# Altium PCB quadrupe.PcbDoc
Units mil, origin at the board's own origin, x right, y up, seen from the top; angles counter-clockwise.
Board outline 1710 x 2670 mil, 2 copper layers (Top Layer, Bottom Layer); 61 components, 55 nets, 278 pads, 26 vias.
Unrouted connection lines stored in the file: 2.
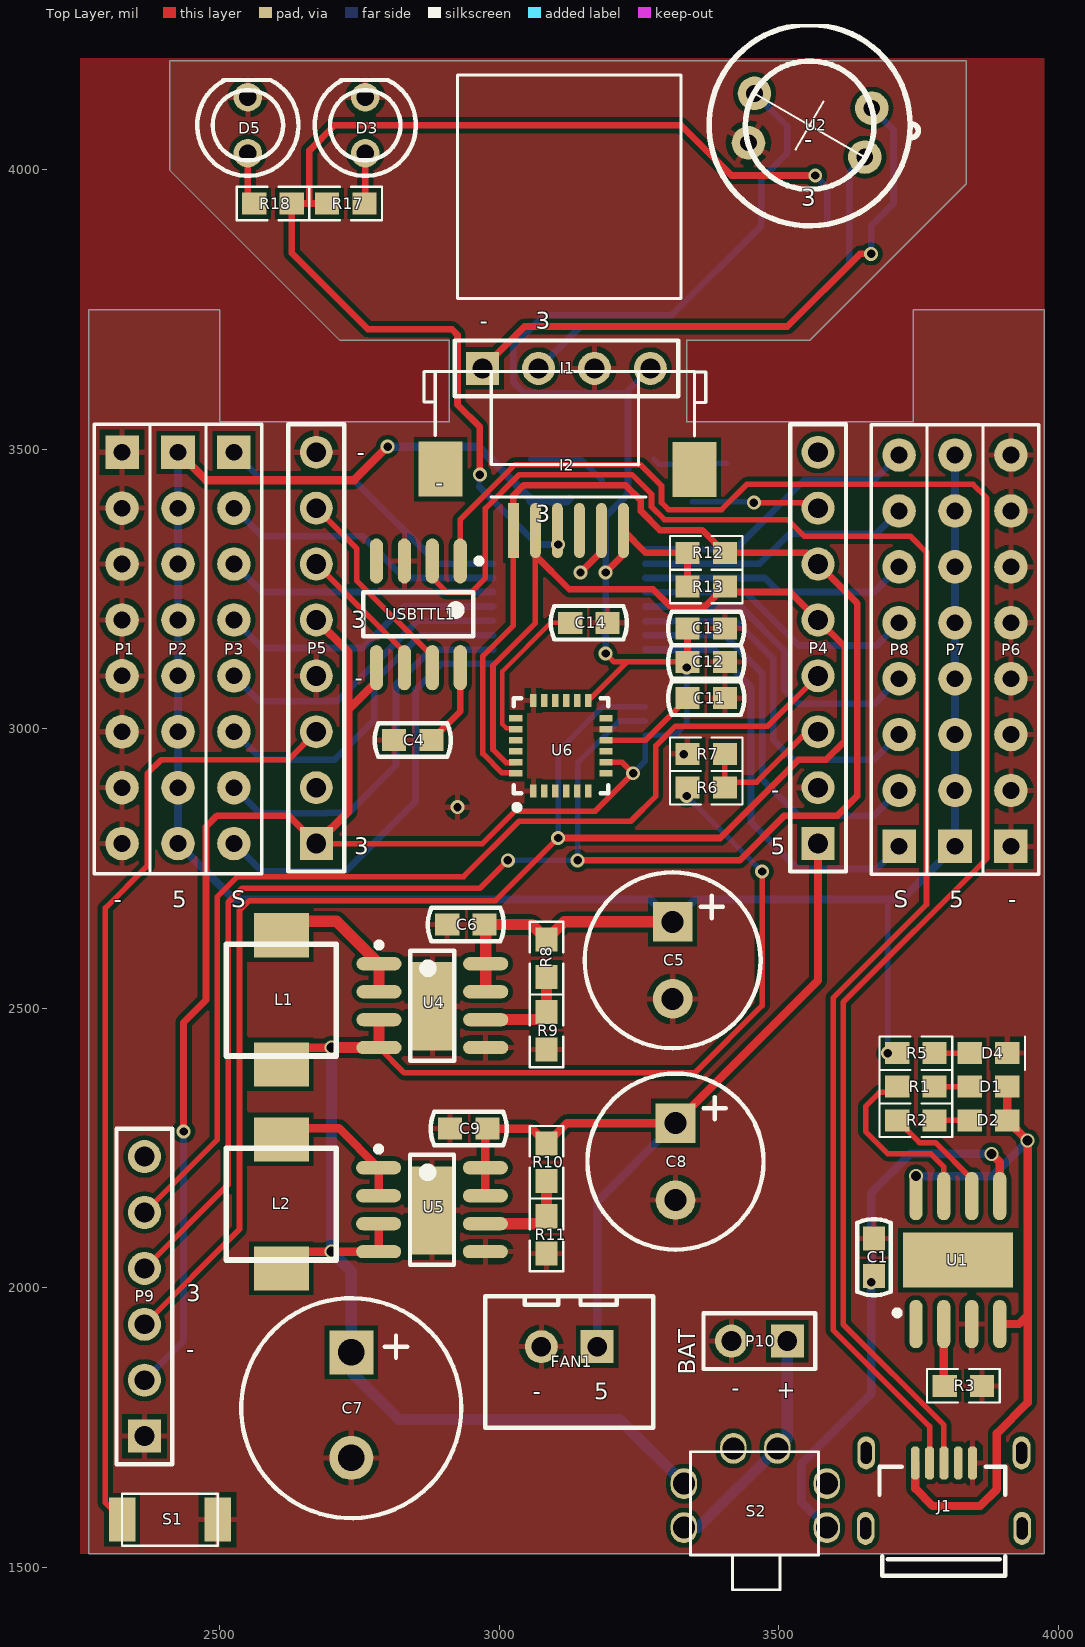
[diagram p0: Top Layer view]
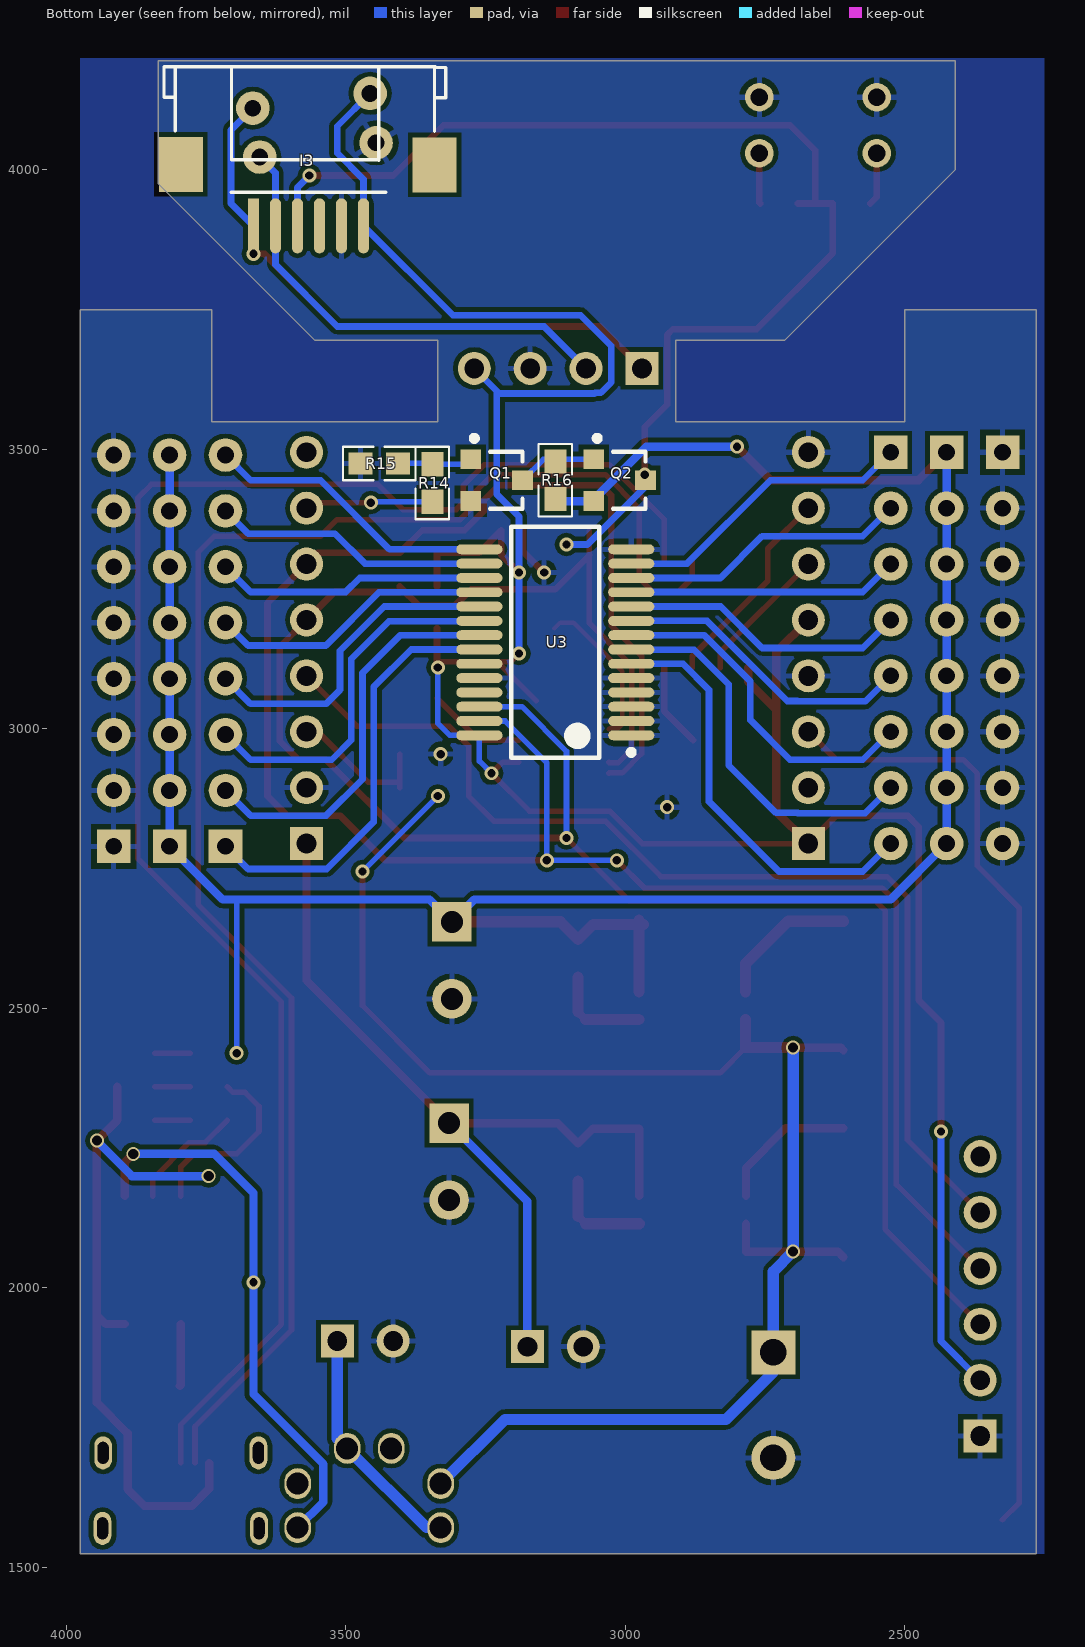
[diagram p1: Bottom Layer view, seen from below]

## Layer stack, top to bottom
Top Layer: signal copper 1.4
Dielectric: dielectric 12.6, FR-4, Dk 4.8
Bottom Layer: signal copper 1.4

## Board outline
2265,1525 2265,3750 2500,3750 2500,3550 2910,3550 2910,3695 2715,3695 2410,4000 2410,4195 3835,4195 3835,3975 3555,3695 3335,3695 3335,3550 3740,3550 3740,3750 3975,3750 3975,1525

## Design rules (kind name [scope] priority, off if disabled: settings)
Clearance Clearance_1 [ispad vs ispad] p1: gap=2
Clearance [All] p2: gap=8
PolygonConnect [All] p1: connectstyle=Relief reliefconductorwidth=10 reliefentries=4 polygonreliefangle="90 Angle" airgapwidth=10
RoutingVias [All] p1: holewidth=15 width=25 viastyle="Through Hole" minholewidth=13 minwidth=15 maxholewidth=28 maxwidth=50
SolderMaskExpansion [All] p1: expansion=4
Width [All] p1: maxlimit=25 minlimit=7 preferedwidth=10
28 further rules are at their usual default settings.

## Components (designator, comment, footprint, x,y, rotation, side; value= is the part's Value field where it differs from the comment)
C1 "Cap" C-RAD-0603 3670,2055 r270 top
C4 "Cap" C-RAD-0603 2845,2980 r0 top
C5 "Cap Pol" C-RB-8 3310,2655 r270 top
C6 "Cap" C-RAD-0603 2940,2650 r0 top
C7 "Cap Pol" C-RB-10 2735,1885 r270 top
C8 "Cap Pol" C-RB-8 3315,2295 r270 top
C9 "Cap" C-RAD-0603 2945,2285 r0 top
C11 "Cap" C-RAD-0603 3370,3055 r180 top
C12 "Cap" C-RAD-0603 3370,3120 r180 top
C13 "Cap" C-RAD-0603 3370,3180 r0 top
C14 "Cap" C-RAD-0603 3160,3190 r180 top
D1 "LED0" 0603-LED 3875,2360 r180 top
D2 "LED0" 0603-LED 3875,2300 r180 top
D3 "LED0" LED_A2 2760,4080 r270 top
D4 "LED0" 0603-LED 3875,2420 r0 top
D5 "LED0" LED_A2 2550,4080 r270 top
FAN1 "Header 2" HDR2X1_B1 3175,1895 r180 top
I1 "Header 4" HDR4X1_A 2970,3645 r0 top
I2 "FPC" FPC1.0-6P-A 3320,3355 r90 top
I3 "FPC" FPC1.0-6P-A 3370,3900 r90 bottom
J1 "USB_M" "USB_MICRO - 4leg" 3795,1575 r0 top
L1 "Inductor" L-SMD-5 2610,2515 r90 top
L2 "Inductor" L-SMD-5 2610,2150 r90 top
P1 "Header 8" HDR8_A1 2325,3495 r270 top
P2 "Header 8" HDR8_A1 2425,3495 r270 top
P3 "Header 8" HDR8_A1 2525,3495 r270 top
P4 "Header 8" HDR1X8 3570,2795 r90 top
P5 "Header 8" HDR1X8 2672.36,2795 r90 top
P6 "Header 8" HDR8_A1 3915,2790 r90 top
P7 "Header 8" HDR8_A1 3815,2790 r90 top
P8 "Header 8" HDR8_A1 3715,2790 r90 top
P9 "Header 6" HDR1X6 2365,1735 r90 top
P10 "Header 2" HDR2X1_A 3515,1905 r180 top
Q1 "SS8050" SOT-23 3230,3445 r270 bottom
Q2 "MOSFET-P" "SOT-23 - MOS" 3010,3445 r270 bottom
R1 "Res1" 0603-1 3745,2360 r180 top
R2 "Res1" 0603-1 3745,2300 r180 top
R3 "Res1" 0603-1 3830,1825 r180 top
R5 "Res1" 0603-1 3745,2420 r180 top
R6 "Res1" 0603-1 3370,2895 r180 top
R7 "Res1" 0603-1 3370,2955 r0 top
R8 "Res1" 0603-1 3084.37,2590 r90 top
R9 "Res1" 0603-1 3084.37,2460 r90 top
R10 "Res1" 0603-1 3084.37,2225 r90 top
R11 "Res1" 0603-1 3084.37,2095 r90 top
R12 "Res1" 0603-1 3370,3315 r0 top
R13 "Res1" 0603-1 3370,3255 r0 top
R14 "Res1" 0603-1 3345,3440 r90 bottom
R15 "Res1" 0603-1 3440,3475 r0 bottom
R16 "Res1" 0603-1 3125,3445 r90 bottom
R17 "Res1" 0603-1 2725,3940 r180 top
R18 "Res1" 0603-1 2595,3940 r0 top
S1 "SW-PB" SW_PB2_3*5 2325,1625 r0 top
S2 "SW_KFC" SW-KFC 3330,1650 r0 top
U1 "TP4056" NSO8_TP4056 3820,2050 r90 top
U2 "MLX90640" MLX90640 3555,4080 r150 top
U3 "pca9685" SSOP-28 3125,3155 r0 bottom
U4 "FP6276" "SOP-8N - 9pad - max" 2880,2505 r0 top
U5 "FP6276" "SOP-8N - 9pad - max" 2879.37,2140 r0 top
U6 "mpu6050" QFN50P400X400X80_HS-25N 3110,2970 r90 top
USBTTL1 "ch340N" SOP-8N 2855,3205 r270 top

## Footprints (in the part's own frame and the unit in brackets; to place one, negate y for a bottom-side part, rotate by r counter-clockwise, add the part's x,y. Pads: shape width x height; smd on the part's side, far side on the other; paste and mask are expansions set on the pad)
0603-1 [mm] "贴片带丝印"
  rect 1.1x1 smd: 1(-0.85,0) 2(0.85,0)
  silkscreen extent -1.65,-0.76 1.65,0.76, body extent -1.14,-0.38 1.14,0.38, height 1
0603-LED [mm]
  rect 1.1x1 smd: 1(-0.85,0) 2(0.85,0)
  silkscreen extent 1.65,-0.76 1.65,0.76, body extent -1.14,-0.38 1.14,0.38, height 1
C-RAD-0603 [mm] "贴片电容"
  rect 1.1x1 smd: 1(-0.85,0) 2(0.85,0)
  silkscreen extent -1.73,-0.76 1.73,0.76, body extent -1.14,-0.38 1.14,0.38, height 1
C-RB-8 [mm] "35V 220UF电容"
  rect 1.8x1.8 hole 1: 1(0,0)
  round 1.8 hole 1: 2(3.5,0)
  silkscreen extent -2.25,-4 5.75,4
C-RB-10 [mm] "35V470uF电容"
  rect 2x2 hole 1.2: 1(0,0)
  round 2 hole 1.2: 2(4.8,0)
  silkscreen extent -2.46,-5 7.54,5
FPC1.0-6P-A [mm] "FPC"
  rect 2.5x0.5 smd: 1(0,7.493)
  oval 2.5x0.5 smd: 2(0,6.493) 3(0,5.493) 4(0,4.493) 5(0,3.493) 6(0,2.493)
  rect 2.5x2 smd: 17(2.794,10.795) 18(2.769,-0.737)
  silkscreen extent 1.52,-1.24 7.22,11.56
HDR1X6 [mm] "Connector; Header; 6 Position"
  rect 1.5x1.5 hole 0.9: 1(0,0)
  round 1.5 hole 0.9: 2(2.54,0) 3(5.08,0) 4(7.62,0) 5(10.16,0) 6(12.7,0)
  silkscreen extent -1.27,-1.27 13.97,1.27
HDR1X8 [mm] "Connector; Header; 8 Position"
  rect 1.5x1.5 hole 0.9: 1(0,0)
  round 1.5 hole 0.9: 2(2.54,0) 3(5.08,0) 4(7.62,0) 5(10.16,0) 6(12.7,0) 7(15.24,0) 8(17.78,0)
  silkscreen extent -1.27,-1.27 19.05,1.27
HDR2X1_A [mm] "Connector; Header; 2 Position"
  rect 1.5x1.5 hole 0.9: 1(0,0)
  round 1.5 hole 0.9: 2(2.54,0)
  silkscreen extent -1.27,-1.27 3.81,1.27
HDR2X1_B1 [mm] "Connector; Header; 4 Position"
  rect 1.5x1.5 hole 0.9: 1(0,0)
  round 1.5 hole 0.9: 2(2.54,0)
  silkscreen extent -2.54,-2.29 5.08,3.68, body extent -2.41,-2.16 5.08,3.56, height 1.5
HDR4X1_A [mm] "Connector; Header; 4 Position"
  rect 1.5x1.5 hole 0.9: 1(0,0)
  round 1.5 hole 0.9: 2(2.54,0) 3(5.08,0) 4(7.62,0)
  silkscreen extent -1.27,-1.27 8.89,1.27
HDR8_A1 [mil]
  rect 60x60 hole 30: 1(0,0)
  round 60 hole 30: 2(100,0) 3(200,0) 4(300,0) 5(400,0) 6(500,0) 7(600,0) 8(700,0)
  silkscreen extent -50,-50 754,50
L-SMD-5 [mm] "贴片电感5*5"
  rect 2x2.5 smd: 1(-2.921,0) 2(2.946,0)
  silkscreen extent -2.54,-2.5 2.54,2.5, body extent -2.54,-2.5 2.54,2.5, height 4
LED_A2 [mm] "直径3MM二极管"
  round 1.3 hole 0.8: 1(1.27,0) 2(-1.27,0)
  silkscreen extent -2.06,-2.3 2.3,2.3
MLX90640 [mil] "红外体温传感器"
  round 60 hole 30: 1(-81,-82) 2(114,0) 3(79,82) 4(-114,0)
  silkscreen extent -180,-180 180,180
NSO8_TP4056 [mm] "SOIC-max660"
  oval 2.2x0.6 smd: 1(-2.908,1.905) 2(-2.908,0.635) 3(-2.908,-0.635) 4(-2.908,-1.905) 5(2.908,-1.905) 6(2.908,-0.635) 7(2.908,0.635) 8(2.908,1.905)
  rect 2.5x5 smd: 9(0,0)
  silkscreen extent -2.52,2.63 -2.28,2.88
QFN50P400X400X80_HS-25N [mm] "QFN, 24-Leads, Body 4.00x4.00mm, Pitch 0.50mm, Thermal Pad 2.65x2.65mm, IPC Medium Density"
  rect 0.6x0.3 smd: 1(-2.05,1.25) 2(-2.05,0.75) 3(-2.05,0.25) 4(-2.05,-0.25) 5(-2.05,-0.75) 6(-2.05,-1.25) 13(2.05,-1.25) 14(2.05,-0.75) 15(2.05,-0.25) 16(2.05,0.25) 17(2.05,0.75) 18(2.05,1.25)
  rect 0.3x0.6 smd: 7(-1.25,-2.05) 8(-0.75,-2.05) 9(-0.25,-2.05) 10(0.25,-2.05) 11(0.75,-2.05) 12(1.25,-2.05) 19(1.25,2.05) 20(0.75,2.05) 21(0.25,2.05) 22(-0.25,2.05) 23(-0.75,2.05) 24(-1.25,2.05)
  silkscreen extent -2.92,-2.15 2.15,2.15, body extent -2,-2 2,2, height 0.8
SOP-8N [mm] "SOP, 8-Leads, Body 5.00x4.00mm, Pitch 1.27mm, IPC Medium Density"
  oval 2.05x0.6 smd: 1(-2.425,1.905) 2(-2.425,0.635) 3(-2.425,-0.635) 4(-2.425,-1.905) 5(2.425,-1.905) 6(2.425,-0.635) 7(2.425,0.635) 8(2.425,1.905)
  silkscreen extent -2.55,-2.5 1,2.88, body extent -2,-2.5 2,2.5, height 2.65
"SOP-8N - 9pad - max" [mm] "SOP, 8-Leads, Body 5.00x4.00mm, Pitch 1.27mm, IPC Medium Density"
  oval 2.05x0.6 smd: 1(-2.425,1.905) 2(-2.425,0.635) 3(-2.425,-0.635) 4(-2.425,-1.905) 5(2.425,-1.905) 6(2.425,-0.635) 7(2.425,0.635) 8(2.425,1.905)
  rect 2x4 smd: 9(0,-0.025)
  silkscreen extent -2.55,-2.5 1,2.88, body extent -2,-2.5 2,2.5, height 2.65
SOT-23 [mm]
  rect 0.9x0.95 smd: 1(-0.95,-1.175) 2(0.95,-1.175) 3(0,1.175)
  silkscreen extent -2.03,-1.14 1.3,1.18
"SOT-23 - MOS" [mm]
  rect 0.9x0.95 smd: D(0,1.175) G(-0.95,-1.175) S(0.95,-1.175)
  silkscreen extent -2.03,-1.14 1.3,1.18
SSOP-28 [mm] "FT232"
  oval 2.1x0.45 smd: 1(-3.45,4.225) 2(-3.45,3.575) 3(-3.45,2.925) 4(-3.45,2.275) 5(-3.45,1.625) 6(-3.45,0.975) 7(-3.45,0.325) 8(-3.45,-0.325) 9(-3.45,-0.975) 10(-3.45,-1.625) 11(-3.45,-2.275) 12(-3.45,-2.925) 13(-3.45,-3.575) 14(-3.45,-4.225) 15(3.45,-4.225) 16(3.45,-3.575) 17(3.45,-2.925) 18(3.45,-2.275) 19(3.45,-1.625) 20(3.45,-0.975) 21(3.45,-0.325) 22(3.45,0.325) 23(3.45,0.975) 24(3.45,1.625) 25(3.45,2.275) 26(3.45,2.925) 27(3.45,3.575) 28(3.45,4.225)
  silkscreen extent -3.57,-5.25 2,5.25, body extent -2.8,-5.25 2.8,5.25, height 2
SW-KFC [mm]
  oval 1.2x1.4 hole 1: 1(0,-2) 2(0,0) 3(2.25,1.6) 4(6.5,-2) 5(6.5,0) 6(4.25,1.6)
  silkscreen extent 0.3,-4.83 6.12,1.45
SW_PB2_3*5 [mm] "2*4"
  rect 1.2x2 smd: 1(0,-1) 2(4.343,-1)
  silkscreen extent 0,-2.18 4.34,0.18, body extent 0,-2.18 4.34,0.18, height 1.4
"USB_MICRO - 4leg" [mm] "USB方孔"
  oval 0.8x1.5 hole 0.5 slot 1 at 90 deg: 0(-3.556,-0.127) 0(-3.531,3.302) 0(3.531,3.302) 0(3.556,-0.127)
  oct 0.4x1.5 smd: 1(-1.295,2.845) 2(-0.645,2.845) 3(0.005,2.845) 4(0.655,2.845) 5(1.305,2.845)
  silkscreen extent -2.92,-2.29 2.79,2.67, body extent -4.1,-1.33 4.1,4.1, height 2.68

## Part data
C1 C4 C6 C9 C11 C12 C13 C14: "无极性电容"
C5 C7 C8: "极性电解电容"
D1 D2 D3 D4 D5: "发光二极管"
FAN1 I1 P10: "接插件"
I2 I3: library part FPC-6P, "FPC排线连接器"
J1: "MicroUSB接口"
L1 L2: "电感"
P1 P2 P3 P4 P5 P6 P7 P8: "Header, 8-Pin"
P9: "Header, 6-Pin"
Q1: "NPN贴片三极管"
Q2: "P-Channel MOSFET"
R1 R2 R3 R5 R6 R7 R8 R9 R10 R11 R12 R13 R14 R15 R16 R17 R18: "贴片电阻"
S1: "微动开关"
S2: "自锁开关 侧卧"
U1: "锂电池充电管理"
U2: "红外热传感器"
U3: "i2c多路pwm控制"
USBTTL1: "串口转USB芯片"

## Via types
v1: diameter 25, hole 15, Top Layer to Bottom Layer, 21 vias
v2: diameter 25, hole 18, Top Layer to Bottom Layer, 5 vias

## Nets (pads, with @x,y where several pads share a name; then routed paths per layer and width w, separated by ;. In a path a pad name is that pad's centre, name@x,y a point inside that pad or via, vN(x,y) a via of type N, cw(c..) or ccw(c..) an arc to the next point about the centre after c; other vN are vias at no path point)
3.3V: C12.2 C13.1 I1.4 I2.6 I3.6 P5.1 P5.5 P9.2 R12.1 R13.1 U2.2 U3.28 U6.8 U6.13 USBTTL1.5 | length 4959.9
  Top Layer w10: P5.1 2969.54,2795 3027.54,2853 3171.43,2853 v1(3239.21,2920.79) 3219.53,2940.47 U6.8 ; U6.13 3228.5,3120 ; v1(3190,3135) 3205,3120 3228.5,3120 ; C12.2 3228.5,3120
  Top Layer w12: v1(2435,2280) 2435,2475 2475,2515 2475,2825 2495,2845 2622.36,2845 P5.1 ; v1(3190,3280) 3221.85,3311.85 I2.6 3261.85,3315 R12.1 R13.1 ; C12.2 C13.1
  Top Layer w15: P5.1 2730,2852.64 2730,3035 ; P5.5 2730,3137.36 2730,3035 ; USBTTL1.5 2780,3085 2730,3035
  Bottom Layer w10: v1(3239.21,2920.79) 3260.83,2942.4 U3.28 3313.66,2988.66 3335,3010 v1(3335,3110)
  Bottom Layer w12: P9.2 2435,1905 v1(2435,2280) ; v1(3190,3135) v1(3190,3280) 3190,3380 3230,3420 3230,3605 I1.4 ; 3225,3600 3055,3600 3053.53,3601.47 3043.53,3601.47 3025,3620 3025,3685 3080,3740 3308.15,3740 I3.6 3468.15,3983.15 3515,4030 3515,4078.27 U2.2
5V: C5.1 C6.2 P2.1 P2.2 P2.3 P2.4 P2.5 P2.6 P2.7 P2.8 P7.1 P7.2 P7.3 P7.4 P7.5 P7.6 P7.7 P7.8 Q2.S R5.2 R8.2 R16.1 U4.7 U4.8 | length 4478.3
  Top Layer w15: P2.1 2475,3445 2740,3445 v1(2800,3505) ; C6.2@2967.48,2650 C6.2@2975.47,2657.99 ; C5.1@3300,2655 C5.1@3310,2665
  Top Layer w20: C6.2@2967.48,2650 3057.83,2650 R8.2 3115.91,2655 C5.1@3300,2655 ; U4.7 U4.8 C6.2@2975.47,2657.99
  Bottom Layer w10: v1(3695,2420) 3695,2695
  Bottom Layer w15: P2.1 P2.2 P2.3 P2.4 P2.5 P2.6 P2.7 P2.8 2525,2695 3270,2695 C5.1 3350,2695 3695,2695 3720,2695 P7.1 P7.2 P7.3 P7.4 P7.5 P7.6 P7.7 P7.8 ; v1(2800,3505) 2962.08,3505 3056.26,3410.82 Q2.S 3121.06,3407.6 R16.1
5VESP: C8.1 C9.2 FAN1.1 P4.1 R10.2 U5.7 U5.8 | length 1549.9
  Top Layer w15: U5.7 U5.8 2974.84,2285 3057.83,2285 R10.2 3120.91,2295 C8.1 3570,2550 P4.1
  Bottom Layer w15: FAN1.1 3175,2155 C8.1
BAT: P4.3 R6.1 R7.2 | length 273.8
  Top Layer w10: R7.2 R6.1 3403.46,2905 3460,2905 3550,2995 P4.3
DC: P9.6
FPC_D: I2.3 I3.3 Q2.D R17.2 R18.2 | length 2115.5
  Top Layer w12: R17.2 2660,3940 ; v1(2965,3455) 2965,3540 2925,3580 2925,3705 2915,3715 2765,3715 2628.46,3851.54 R18.2 2660,3940 ; v1(3565,3990) 3415,3990 3325,4080 2705,4080 2660,4035 2660,3940
  Bottom Layer w12: Q2.D@2963.74,3433.9 3067.64,3330 v1(3105,3330) ; Q2.D@2963.74,3443.9 Q2.D ; v1(3565,3990) 3586.26,3968.74 I3.3
GND: C1.1 C4.1 C5.2 C6.1 C7.2 C8.2 C9.1 C11.1 C12.1 C13.2 C14.1 D3.2 D4.2 D5.2 FAN1.2 I1.3 I2.5 I3.5 J1.5 P1.1 P1.2 P1.3 P1.4 P1.5 P1.6 P1.7 P1.8 P4.2 P5.4 P5.8 P6.1 P6.2 P6.3 P6.4 P6.5 P6.6 P6.7 P6.8 P9.1 P10.2 Q1.2 R3.1 R7.1 R9.1 R11.1 R15.2 S1.2 U1.3 U2.3 U3.1 U3.2 U3.3 U3.4 U3.5 U3.14 U3.24 U4.5 U4.9 U5.5 U5.9 U6.1 U6.11 U6.18 USBTTL1.3 | length 90.5
  Top Layer w12: v1(3145,3280) 3182.48,3317.48 I2.5
  other v1: 2925,2860 3330,2955
IO0: P5.3 S1.1 | length 1711.3
  Top Layer w10: S1.1 2295,1615.63 2295,2680 2370,2755 2370,2920 2395,2945 2622.36,2945 P5.3
IO2: P4.7 R14.1 | length 229.8
  Top Layer w10: v1(3455,3405) 3560,3405 P4.7
  Bottom Layer w10: R14.1 3453.46,3406.54 v1(3455,3405)
IO4: P4.8
IO13: P4.4 P9.5 | length 1910
  Top Layer w10: P9.5 2495,2265 2495,2699.7 2531.3,2736 2936,2736 3035,2835 3235,2835 3280,2880 3280,2970 3315,3005 3480,3005 P4.4
IO14: I1.1 I2.1 I3.1 P4.6 P9.4 R12.2 U2.1 U3.27 U6.24 | length 4944.4
  Top Layer w10: P9.4 2515,2185 2515,2690 2540,2715 2965,2715 v1(3015,2765) ; I2.1 3025,3185 2970.48,3130.48 2970.48,2955.85 3004.77,2921.57 3028.51,2921.57 U6.24
  Top Layer w12: I1.1 3045,3720 3515,3720 3645,3850 v1(3665,3850) ; I2.1 3025,3417.67 3043.33,3436 3225.77,3436 3253,3408.77 3253,3389.67 3287.17,3355.5 3362.96,3355.5 R12.2 3550,3315 P4.6 3640,3225 3640,2880 3605,2845 3510,2845 3430,2765 v1(3140,2765)
  Bottom Layer w10: v1(3015,2765) v1(3140,2765) 3140,2940 3140.46,2940 3214.71,3014.25 U3.27
  Bottom Layer w12: v1(3665,3850) I3.1 3705,3940 3705,4071.66 U2.1
IO15: I1.2 I2.2 I3.2 P4.5 P9.3 R13.2 U2.4 U3.26 U6.23 | length 4488.3
  Top Layer w10: P9.3 2535,2105 2535,2675 2553,2693 2993,2693 v1(3105,2805) ; U6.23 3028.51,2939.69 3012.1,2939.69 2988.48,2963.31 2988.48,3113.48 3064.37,3189.37 3064.37,3310.63 I2.2
  Top Layer w12: I2.2@3064.37,3310.63 3125,3250 3275,3250 3305,3220 3368.46,3220 R13.2 ; v1(3105,2805) 3395,2805 3535,2945 3584.39,2945 3618,2978.61 3618,3147 P4.5 3520,3245 R13.2@3403.46,3245
  Bottom Layer w10: v1(3105,2805) 3105,2960 3184.84,3039.84 U3.26
  Bottom Layer w12: I1.2 3145,3720 3515,3720 3625.63,3830.63 I3.2 3625.63,3994.9 U2.4
IO16: P5.2
NetC4_2: C4.2 USBTTL1.8 | length 150.9
  Top Layer w12: C4.2 2930,3031.54 USBTTL1.8
NetC7_1: C7.1 L1.1 L2.1 R6.2 S2.2 U4.3 U4.4 U5.3 U5.4 | length 2913.2
  Top Layer w10: U4.4 2829.53,2385 3350,2385 3470,2505 v1(3470,2745)
  Top Layer w15: L2.1@2609.37,2055 2619.37,2065 U5.4 U5.3 ; L1.1@2609.37,2425 2614.37,2430 v2(2699.45,2430)
  Top Layer w20: v2(2699.45,2430) U4.4 U4.3
  Bottom Layer w10: v1(3335,2880) v1(3470,2745)
  Bottom Layer w20: v2(2699.45,2430) v2(2699.45,2065) 2735,2029.45 2735,1850 2820,1765 3215,1765 S2.2
NetC11_2: C11.2 U6.10 | length 177
  Top Layer w10: U6.10 3261.38,2979.84 C11.2
NetC14_2: C14.2 U6.20 | length 283.6
  Top Layer w8: U6.20 3027.51,3001.31 3012.51,3001.31 3005.48,3008.34 3005.48,3103.48 3092,3190 3116.54,3190 C14.2@3126.54,3180
NetD1_2: D1.2 R1.1 | length 63.1
  Top Layer w10: R1.1 D1.2
NetD2_2: D2.2 R2.1 | length 63.1
  Top Layer w10: R2.1 D2.2
NetD3_1: D3.1 R17.1 | length 90.6
  Top Layer w12: R17.1 2760,3941.54 D3.1
NetD4_1: D4.1 R5.1 | length 63.1
  Top Layer w10: R5.1 D4.1
NetD5_1: D5.1 R18.1 | length 94.8
  Top Layer w12: D5.1 2550,3951.54 R18.1
NetJ1_2: J1.2 USBTTL1.2 | length 2925.1
  Top Layer w10: USBTTL1.2 2880,3270 2905,3245 2950,3245 2975,3270 2975,3394.54 3035.46,3455 3237,3455 3272,3420 3272,3397.54 3295.04,3374.5 3515.5,3374.5 3545,3345 3735,3345 3763.96,3316.04 3763.96,2686.04 3597,2519.07 3597,1924.72 3769.59,1752.13 J1.2
NetJ1_3: J1.3 USBTTL1.1 | length 3043.9
  Top Layer w10: USBTTL1.1 2930,3375 3028,3473 3252,3473 3290,3435 3290,3405 3302.5,3392.5 3397.5,3392.5 3442.53,3437.53 3847.47,3437.53 3872,3413 3872,2768.62 3615,2511.62 3615,1935 3795.18,1754.82 J1.3
NetL1_2: L1.2 U4.1 U4.2 | length 256.6
  Top Layer w20: L1.2@2609.37,2656 2708.53,2656 U4.1 U4.2
NetL2_2: L2.2 U5.1 U5.2 | length 253.9
  Top Layer w15: L2.2@2609.37,2286 2712.9,2286 U5.1 U5.2
NetQ1_1: Q1.1 R14.2 R15.1 | length 134.6
  Bottom Layer w10: Q1.1 3285.2,3473.46 R14.2 3346.54,3475 R15.1
NetQ1_3: Q1.3 Q2.G R16.2 | length 143
  Bottom Layer w10: Q2.G 3146.34,3482.4 Q1.3
NetR1_2: R1.2 U1.7 | length 334.5
  Top Layer w10: R1.2 3701.54,2350 3680,2350 3655,2325 3655,2280 3695,2240 3771.72,2240 3795,2216.72 U1.7
NetR2_2: R2.2 U1.6 | length 207.5
  Top Layer w10: R2.2 3751.54,2260 3780,2260 3845,2195 U1.6
NetR3_2: R3.2 U1.2 | length 111.1
  Top Layer w15: U1.2 3795,1826.54 R3.2
NetR8_1: R8.1 R9.2 U4.6 | length 177.5
  Top Layer w15: R9.2@3070.91,2480 R9.2
  Top Layer w20: U4.6 R9.2@3070.91,2480 ; R9.2 R8.1
NetR10_1: R10.1 R11.2 U5.6 | length 178.2
  Top Layer w15: R11.2@3070.91,2115 R11.2
  Top Layer w20: U5.6 R11.2@3070.91,2115 ; R11.2 R10.1
O0: P3.8 U3.6 | length 756
  Bottom Layer w12: P3.8 2575,2745 2725,2745 2850,2870 2850,3070 2896.61,3116.61 U3.6
O1: P3.7 U3.7 | length 689.2
  Bottom Layer w12: P3.7 2570.53,2849.47 2691.22,2849.47 2691.75,2850 2730,2850 2815,2935 2815,3080 2876.47,3141.47 2988.44,3141.47 U3.7
O2: P3.6 U3.8 | length 617.5
  Bottom Layer w12: P3.6 2575,2945 2705,2945 2776.11,3016.11 2776.11,3085 2858.91,3167.8 U3.8
O3: P3.5 U3.9 | length 542.6
  Bottom Layer w12: P3.5 2570.53,3049.47 2691.22,3049.47 2691.75,3050 2710,3050 2853.39,3193.39 U3.9
O4: P3.4 U3.10 | length 515.5
  Bottom Layer w12: P3.4 2575,3145 2755,3145 2828.98,3218.98 U3.10
O5: P3.3 U3.11 | length 485.1
  Bottom Layer w12: P3.3 2575,3245 2988.74,3245 U3.11
O6: P3.2 U3.12 | length 515.9
  Bottom Layer w12: P3.2 2575,3345 2755,3345 2829.84,3270.16 U3.12
O7: P3.1 U3.13 | length 546.7
  Bottom Layer w12: P3.1 2575,3445 2740,3445 2889.25,3295.75 U3.13
O8: P8.8 U3.15 | length 524
  Bottom Layer w12: U3.15 3421.34,3321.34 3545,3445 3670,3445 P8.8
O9: P8.7 U3.16 | length 493.2
  Bottom Layer w12: U3.16 3465.75,3295.75 3519.47,3349.47 3674.47,3349.47 P8.7
O10: P8.6 U3.17 | length 483.2
  Bottom Layer w12: U3.17 3474.84,3270.16 3500,3245 3670,3245 P8.6
O11: P8.5 U3.18 | length 510.3
  Bottom Layer w12: U3.18 3440.43,3244.57 3535.53,3149.47 3674.47,3149.47 P8.5
O12: P8.4 U3.19 | length 585.9
  Bottom Layer w12: U3.19 3431.02,3218.98 3510,3140 3510,3070 3535,3045 3670,3045 P8.4
O13: P8.3 U3.20 | length 660.6
  Bottom Layer w12: U3.20 3261.56,3192.65 3422.35,3192.65 3490,3125 3490,2980 3525,2945 3670,2945 P8.3
O14: P8.2 U3.21 | length 717.8
  Bottom Layer w12: U3.21 3402.2,3167.8 3470,3100 3470,2910 3535,2845 3670,2845 P8.2
O15: P8.1 U3.22 | length 775.2
  Bottom Layer w12: U3.22 3382.8,3142.2 3450,3075 3450,2833.32 3533.84,2749.47 3674.47,2749.47 P8.1
RX: P5.7 USBTTL1.7 | length 371.5
  Top Layer w10: P5.7 2745,3322.36 2745,3265 2880,3130 USBTTL1.7
TX: P5.6 USBTTL1.6 | length 250.8
  Top Layer w10: P5.6 2830,3137.36 USBTTL1.6
VBAT: P10.1 S2.1 S2.6 | length 425.4
  Bottom Layer w20: S2.1 3355.59,1571.26 S2.6 3515,1730.67 P10.1
VBUS: D1.1 D2.1 J1.1 U1.4 U1.8 | length 1258.4
  Top Layer w15: J1.1 3744,1641 3775,1610 3860,1610 3890,1640 3890,1740 3945,1795 3945,1951.02 ; U1.4 3929.49,1935.51 3945,1951.02 ; D1.1 D2.1 v2(3945,2263.46) 3945,1951.02
  Bottom Layer w15: v2(3745,2200) 3882.43,2200 3945,2262.57 v2(3945,2263.46)
VCHARGE: C1.2 S2.4 U1.5 | length 995.3
  Top Layer w15: v2(3880,2240) 3895,2225 U1.5
  Bottom Layer w15: S2.4 3540,1617.17 3540,1685 3665,1810 3665,2170 3735,2240 v2(3880,2240)
  other v1: 3665,2010
pads on no net: I2.4 I2.17 I2.18 I3.4 I3.17 I3.18 J1.0 J1.4 S2.3 S2.5 U1.1 U1.9 U3.23 U3.25 U6.2 U6.3 U6.4 U6.5 U6.6 U6.7 U6.9 U6.12 U6.14 U6.15 U6.16 U6.17 U6.19 U6.21 U6.22 USBTTL1.4

## Polygon pours and split planes (outlines as drawn)
GND on Top Layer "Top Layer-No Net" (solid, remove dead copper, pour order 4): 2250,4200 3975,4200 3975,1525 2250,1525
GND on Bottom Layer "Top Layer-No Net" (solid, remove dead copper, pour order 6): 2250,4200 3975,4200 3975,1525 2250,1525

## Silkscreen, mask and mechanical layers (free items; w line width, h text height)
Top Overlay:
  lines w5: 2925,3770 2925,4170 3325,4170 3325,3770 2925,3770
  text "-" at 3545,4040 h30
  text "3" at 3540,3935 h30
  text "-" at 2965,3715 h30
  text "3" at 3065,3715 h30
  text "-" at 2745,3480 h30
  text "-" at 2885,3425 h30
  text "3" at 3065,3370 h30
  text "3" at 2735,3180 h30
  text "-" at 2741,3076 h30
  text "-" at 3486,2876 h30
  text "3" at 2740,2775 h30
  text "5" at 3485,2775 h30
  text "-" at 2310,2680 h30
  text "5" at 2415,2680 h30
  text "S" at 2520,2680 h30
  text "S" at 3705,2680 h30
  text "5" at 3805,2680 h30
  text "-" at 3910,2680 h30
  text "3" at 2440,1975 h30
  text "-" at 2440,1875 h30
  text "BAT" at 3350,1845 h30 r90
  text "-" at 3430,1830 h30 r180
  text "+" at 3530,1830 h30 r180
  text "-" at 3060,1800 h30
  text "5" at 3170,1800 h30
Mechanical 1:
  circle w3.94: c3860,3650 r62.99
  circle w3.94: c2380,3650 r62.99
  circle w3.94: c2825,3775 r39.37
  circle w3.94: c3420,3775 r39.37
  circle w3.94: c3120,1640 r62.99
  circle w3.94: c2380,2600 r62.99
  circle w3.94: c3860,2600 r62.99
  lines w5: 2265,1525 2265,3550 2265,3750 2500,3750 2500,3550 2910,3550 2910,3695 2715,3695 2410,4000 2410,4195 3835,4195 3835,3975 3555,3695 3335,3695 3335,3550 3740,3550 3740,3750 3975,3750 3975,3550 3975,1525 2265,1525